# EAGLE board controller (EAGLE 6.1)
DATE: 01/14; PART#: PC-03; PROJECT: CLOCK; REV: A
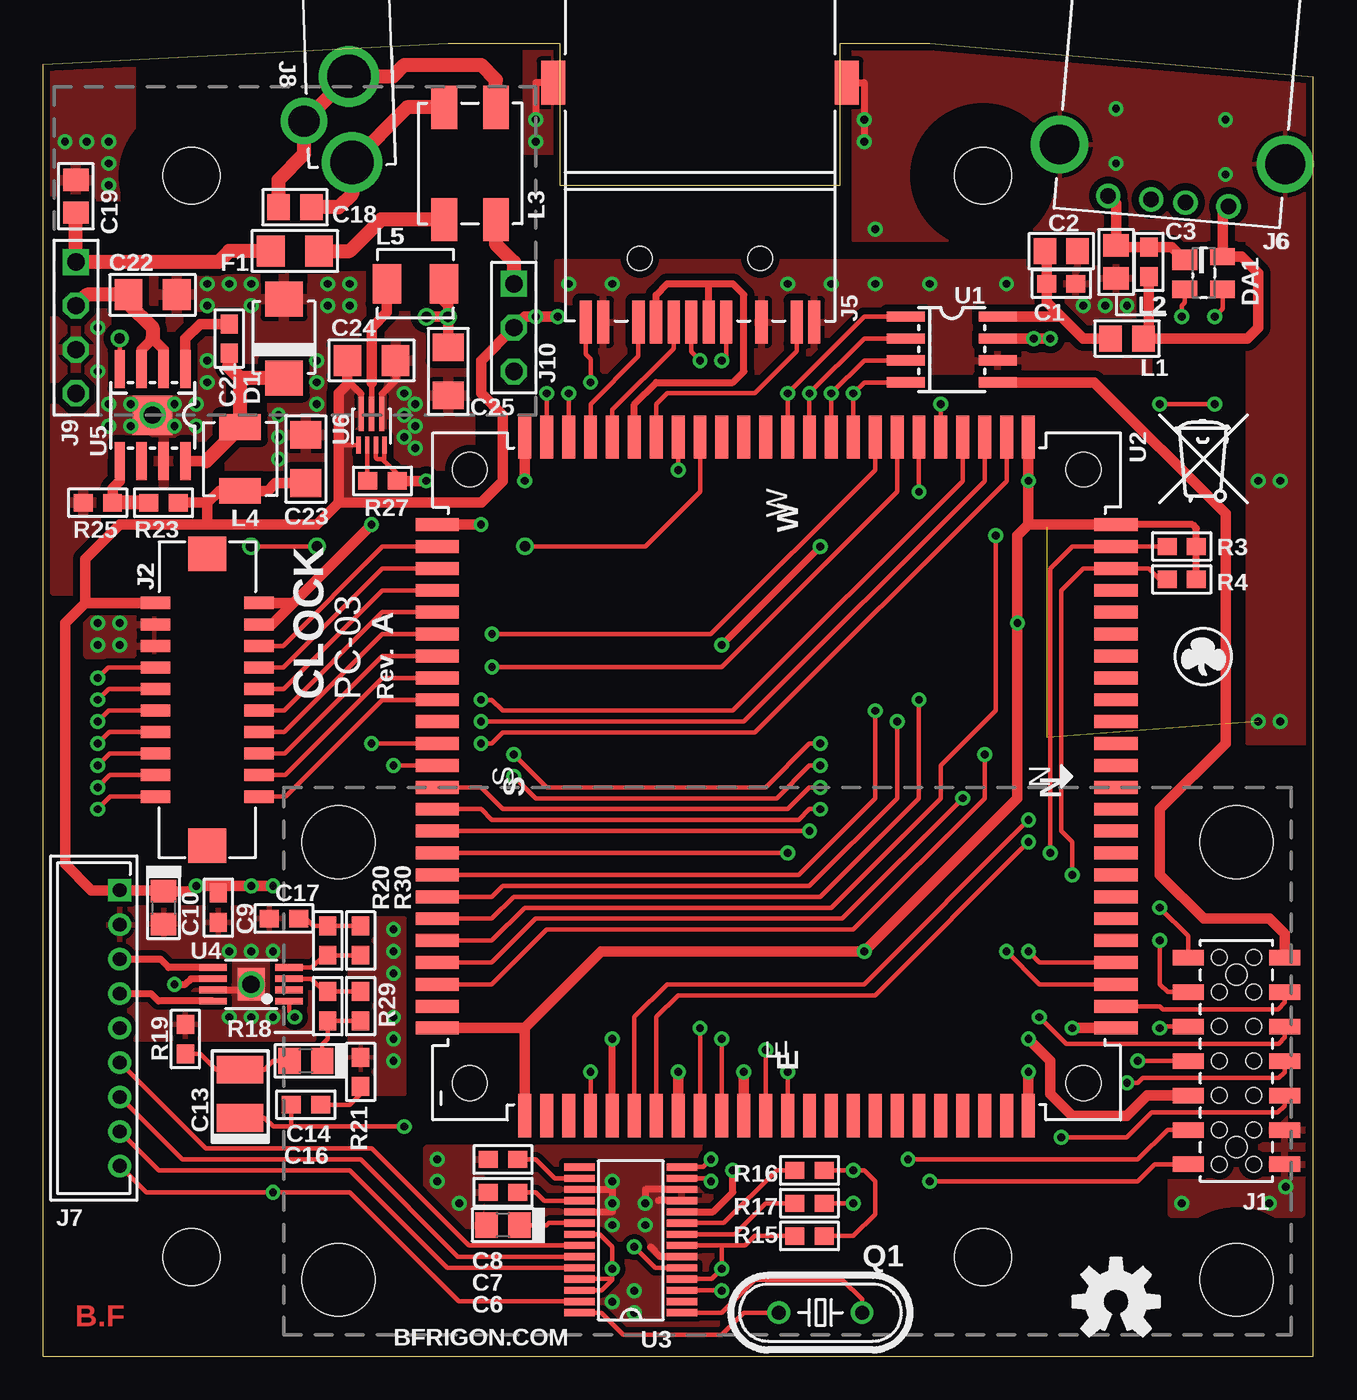
[diagram p0: board, top side]
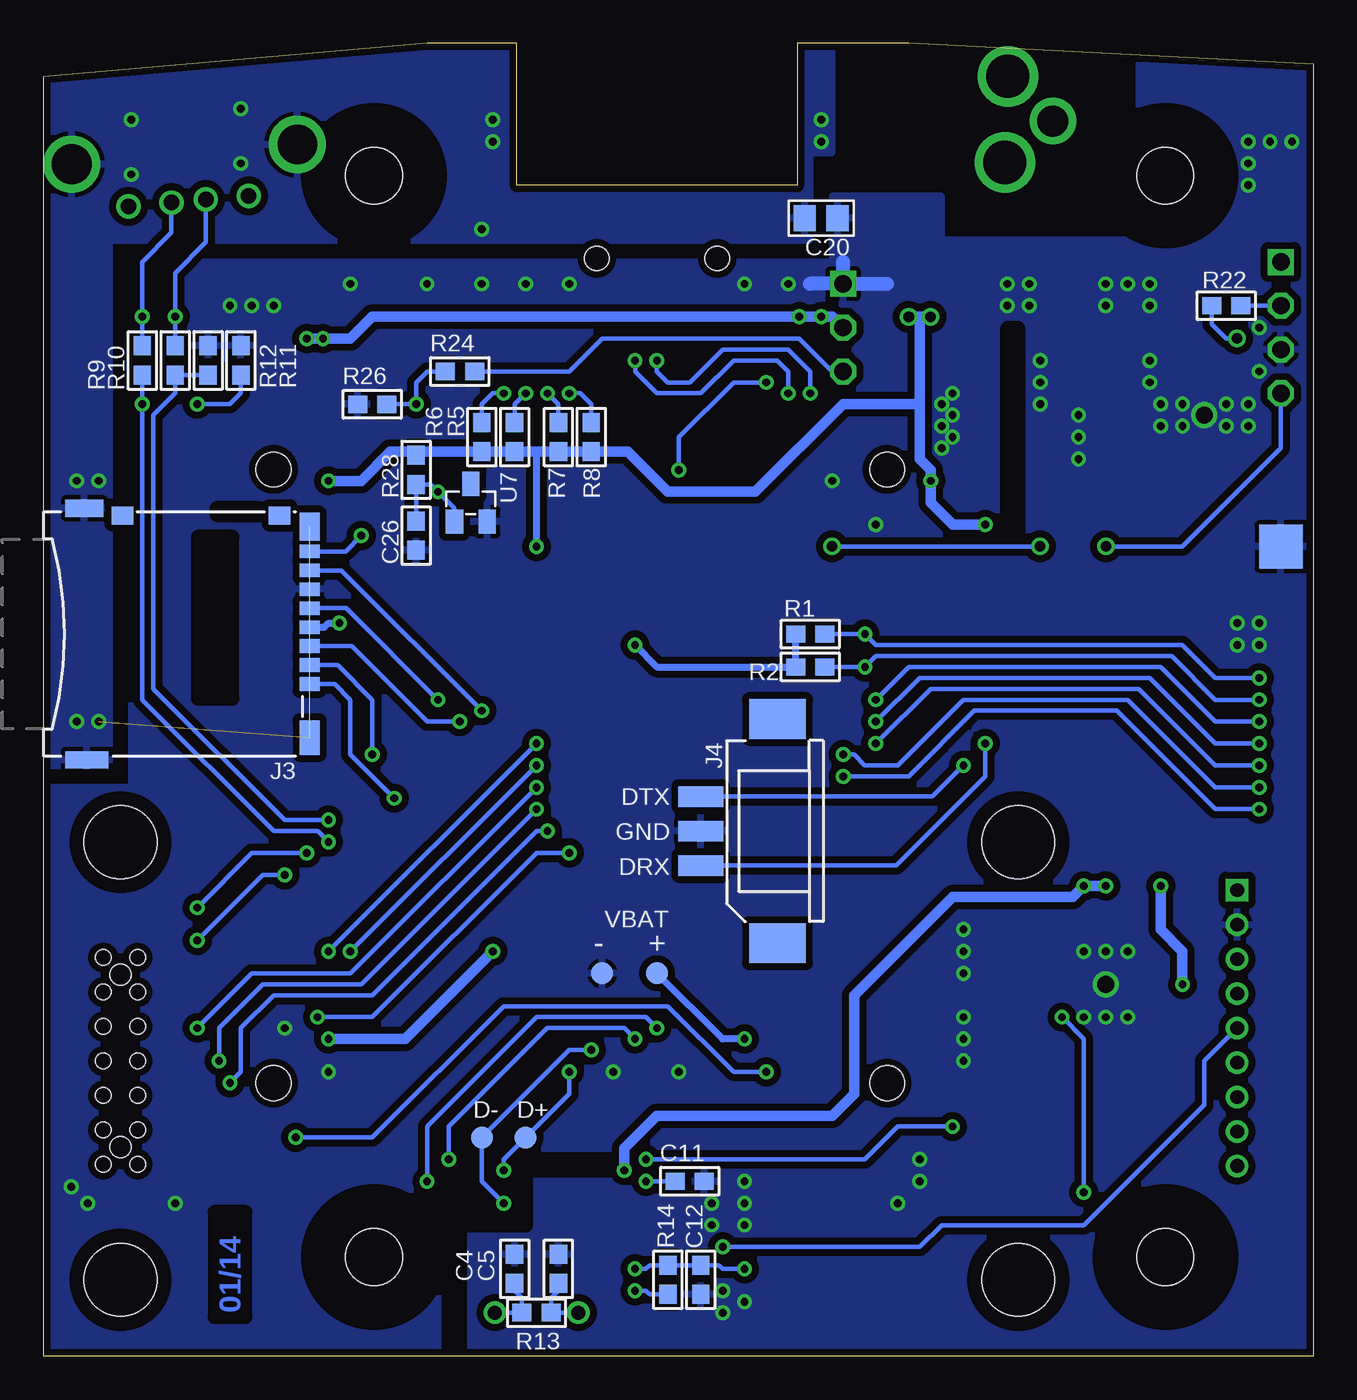
[diagram p1: board, bottom side, seen from below]

Size 73.66 x 76.2 mm. Coordinates in mm from the lower left corner, seen from the top.
Outline: 0,0 73.66,0 73.66,74.24 51.44,76.2 46.23,76.2 46.23,67.94 29.97,67.94 29.97,76.2 23.5,76.2 0,74.98 0,0
Copper layers (1*16): Top 0.035mm / dielectric 1.5mm / Bottom 0.035mm
Design rules: minimum track width 8mil, minimum drill 18mil, track to track 8mil, track to pad 8mil, pad to pad 8mil, via to via 8mil, smd to smd 6mil, copper to edge 15mil, drill to drill 8mil, minimum pad ring 10mil, minimum via ring 8mil, stop-mask expansion 4mil, vias tented up to drill 24mil, thermal gap 10mil
Net classes: 1 Power: width 0.406 mm, drill 0.457 mm, clearance 0.203 mm
Holes 3.28 mm at 8.61,5.77 54.51,5.77 54.51,68.5 8.61,68.5
Holes 4.22 mm at 17.14,4.45 69.22,4.45 69.22,29.84 17.14,29.84
tRestrict: area 4.8,2 to 12.4,9.6; area 4.8,64.7 to 12.4,72.3; area 50.7,2 to 58.3,9.6; area 50.7,64.7 to 58.3,72.3; area 13.3,0.6 to 21,8.3; area 13.3,26 to 21,33.7; area 65.4,26 to 73,33.7; area 65.4,0.6 to 73,8.3
bRestrict: area 4.8,2 to 12.4,9.6; area 4.8,64.7 to 12.4,72.3; area 50.7,64.7 to 58.3,72.3; area 50.7,2 to 58.3,9.6; area 66.7,27.3 to 71.8,32.4; area 66.7,1.9 to 71.8,7; area 14.6,1.9 to 19.7,7; area 14.6,27.3 to 19.7,32.4; area 40.6,0 to 50.2,11.4; area 17.1,47.6 to 17.8,59.7

## Footprints (pad centres in the part's own frame; a part is rotated, then mirrored left to right if it is on the bottom)
SMD_0603 = smd 1.1 x 1: 1 -0.85,0; 2 0.85,0
SMD_0805 = smd 1.3 x 1.5: 1 -0.95,0; 2 0.95,0
CAP_S0805 = smd 1.3 x 1.5: + -0.95,0; - 0.95,0
CAP_S1210 = smd 1.6 x 2.7: + -1.4,0; - 1.4,0
SMD_1206 = smd 1.6 x 1.8: 1 -1.4,0; 2 1.4,0
DIODE_DO214-AA = smd 2.032 x 2.184: A -2.286,0; K 2.286,0
SOT143 = smd 1.2 x 1.44: 1 -0.75,-1.1 | smd 1 x 1.44: 2 0.95,-1.1; 3 0.95,1.1; 4 -0.95,1.1
3M-956214-2XXX = smd 0.9 x 1.8: 1 6,2.8; 2 6,-2.8; 3 4,2.8; 4 4,-2.8; 5 2,2.8; 6 2,-2.8; 7 0,2.8; 8 0,-2.8; 9 -2,2.8; 10 -2,-2.8; 11 -4,2.8; 12 -4,-2.8; 13 -6,2.8; 14 -6,-2.8 | hole 0.9: -4,1; -2,1; -2,-1; -4,-1; -6,1; -6,-1; 0,-1; 0,1; 2,-1; 2,1; 4,-1; 4,1; 6,-1; 6,1 | hole 1.19: -5,0; 5,0
DF13A-20DP-1.25 = smd 0.7 x 1.7: 1 5.625,3; 2 5.625,-3; 3 4.375,3; 4 4.375,-3; 5 3.125,3; 6 3.125,-3; 7 1.875,3; 8 1.875,-3; 9 0.625,3; 10 0.625,-3; 11 -0.625,3; 12 -0.625,-3; 13 -1.875,3; 14 -1.875,-3; 15 -3.125,3; 16 -3.125,-3; 17 -4.375,3; 18 -4.375,-3; 19 -5.625,3; 20 -5.625,-3 | smd 2 x 2.2: A -8.475,0; B 8.475,0
5027020891 = smd 0.8 x 1.16: 1 -2.9,-15.42; 2 -1.8,-15.42; 3 -0.7,-15.42; 4 0.4,-15.42; 5 1.5,-15.42; 6 2.6,-15.42; 7 3.7,-15.42; 8 4.8,-15.42 | smd 1.05 x 1.25: DC 6.885,-13.675; DT 6.885,-4.55 | smd 1 x 2.5: SHDL@3 -7.3,-2.5 | smd 2 x 1.16: SHLD@1 -6.01,-15.42 | smd 1.6 x 1.16: SHLD@2 6.24,-15.42 | smd 1 x 2.2: SHLD@4 7.3,-2.35
DF3DZ-3P-2VXX = smd 1.2 x 2.6: 1 2,0; 2 0,0; 3 -2,0 | smd 2.3 x 3.3: G@1 -6.5,4.45; G@2 6.5,4.45
7498011122R = smd 0.71 x 2.5: P1 -3.57,-21.9; P2 -2.55,-21.9; P3 -1.53,-21.9; P4 -0.51,-21.9; P5 0.51,-21.9; P6 1.53,-21.9; P8 3.57,-21.9; P9 5.61,-21.9; P10 6.63,-21.9; P11 -6.63,-21.9; P12 -5.61,-21.9 | smd 1.4 x 2.54: S1 -8.51,-8.01; S2 8.51,-8.01 | hole 1.4: -3.5,-18.21; 3.5,-18.21
292303-7 = drill 0.9: 1 13,3.5; 2 13,1; 3 13,-1; 4 13,-3.5 | drill 2.3: SHLD@1 10.28,6.57; SHLD@2 10.28,-6.57
DF3X-9P-2DSA = drill 0.8 square: 1 8,0 | drill 0.8: 2 6,0; 3 4,0; 4 2,0; 5 0,0; 6 -2,0; 7 -4,0; 8 -6,0; 9 -8,0
CUI-PJ-013C = drill 2.5: 1 11.2,0; 2 6.2,0 | drill 1.8: 3 8.7,-2.7
HDR_M_4 = drill 1 square: 1 0,0 | drill 1 octagon: 2 2.54,0; 3 5.08,0; 4 7.62,0
HDR_M_3 = drill 1 square: 1 -2.54,0 | drill 1 octagon: 2 0,0; 3 2.54,0
ACM7060 = smd 2.5 x 1.5: IA -3.25,1.5; IB -3.25,-1.5; OA 3.25,1.5; OB 3.25,-1.5
IND_4020 = smd 1.5 x 2.4: 1 -1.85,0; 2 1.85,0
IND_4045 = smd 2.3 x 1.65: 1 0,1.65; 2 0,-1.65
HC49/S = drill 0.813: 1 -2.413,0; 2 2.413,0
TP_050 = smd 1.27 x 1.27: 1 0,0
TP_75X75 = smd 2.54 x 2.54: 1 0,0
SOIC8 = smd 0.6 x 2.2: 1 -1.905,-2.667; 2 -0.635,-2.667; 3 0.635,-2.667; 4 1.905,-2.667; 5 1.905,2.667; 6 0.635,2.667; 7 -0.635,2.667; 8 -1.905,2.667
ARIA_G25 = smd 2.5 x 0.75: E1 19.685,14.605; E2 19.685,13.335; E3 19.685,12.065; E4 19.685,10.795; E5 19.685,9.525; E6 19.685,8.255; E7 19.685,6.985; E8 19.685,5.715; E9 19.685,4.445; E10 19.685,3.175; E11 19.685,1.905; E12 19.685,0.635; E13 19.685,-0.635; E14 19.685,-1.905; E15 19.685,-3.175; E16 19.685,-4.445; E17 19.685,-5.715; E18 19.685,-6.985; E19 19.685,-8.255; E20 19.685,-9.525; E21 19.685,-10.795; E22 19.685,-12.065; E23 19.685,-13.335; E24 19.685,-14.605; W1 -19.685,-14.605; W2 -19.685,-13.335; W3 -19.685,-12.065; W4 -19.685,-10.795; W5 -19.685,-9.525; W6 -19.685,-8.255; W7 -19.685,-6.985; W8 -19.685,-5.715; W9 -19.685,-4.445; W10 -19.685,-3.175; W11 -19.685,-1.905; W12 -19.685,-0.635; W13 -19.685,0.635; W14 -19.685,1.905; W15 -19.685,3.175; W16 -19.685,4.445; W17 -19.685,5.715; W18 -19.685,6.985; W19 -19.685,8.255; W20 -19.685,9.525; W21 -19.685,10.795; W22 -19.685,12.065; W23 -19.685,13.335; W24 -19.685,14.605 | smd 0.75 x 2.5: N1 -14.605,19.685; N2 -13.335,19.685; N3 -12.065,19.685; N4 -10.795,19.685; N5 -9.525,19.685; N6 -8.255,19.685; N7 -6.985,19.685; N8 -5.715,19.685; N9 -4.445,19.685; N10 -3.175,19.685; N11 -1.905,19.685; N12 -0.635,19.685; N13 0.635,19.685; N14 1.905,19.685; N15 3.175,19.685; N16 4.445,19.685; N17 5.715,19.685; N18 6.985,19.685; N19 8.255,19.685; N20 9.525,19.685; N21 10.795,19.685; N22 12.065,19.685; N23 13.335,19.685; N24 14.605,19.685; S1 14.605,-19.685; S2 13.335,-19.685; S3 12.065,-19.685; S4 10.795,-19.685; S5 9.525,-19.685; S6 8.255,-19.685; S7 6.985,-19.685; S8 5.715,-19.685; S9 4.445,-19.685; S10 3.175,-19.685; S11 1.905,-19.685; S12 0.635,-19.685; S13 -0.635,-19.685; S14 -1.905,-19.685; S15 -3.175,-19.685; S16 -4.445,-19.685; S17 -5.715,-19.685; S18 -6.985,-19.685; S19 -8.255,-19.685; S20 -9.525,-19.685; S21 -10.795,-19.685; S22 -12.065,-19.685; S23 -13.335,-19.685; S24 -14.605,-19.685 | hole 2: -17.8,-17.8; 17.8,-17.8; 17.8,17.8; -17.8,17.8
TSSOP28 = smd 0.42 x 1.78: 1 0,-5.94; 2 0.65,-5.94; 3 1.3,-5.94; 4 1.95,-5.94; 5 2.6,-5.94; 6 3.25,-5.94; 7 3.9,-5.94; 8 4.55,-5.94; 9 5.2,-5.94; 10 5.85,-5.94; 11 6.5,-5.94; 12 7.15,-5.94; 13 7.8,-5.94; 14 8.45,-5.94; 15 8.45,0; 16 7.8,0; 17 7.15,0; 18 6.5,0; 19 5.85,0; 20 5.2,0; 21 4.55,0; 22 3.9,0; 23 3.25,0; 24 2.6,0; 25 1.95,0; 26 1.3,0; 27 0.65,0; 28 0,0
PPSOP8 = smd 0.4 x 1.6: 1 -0.975,-2.2; 2 -0.325,-2.2; 3 0.325,-2.2; 4 0.975,-2.2; 5 0.975,2.2; 6 0.325,2.2; 7 -0.325,2.2; 8 -0.975,2.2 | smd 1.89 x 1.57: T 0,0
SOIC8-EP = smd 0.6 x 2.2: 1 -1.905,-2.667; 2 -0.635,-2.667; 3 0.635,-2.667; 4 1.905,-2.667; 5 1.905,2.667; 6 0.635,2.667; 7 -0.635,2.667; 8 -1.905,2.667 | smd 2.3 x 2.3: EP 0,0
QFN-7 = smd 0.25 x 1: 1 -0.75,-1.1; 2 -0.25,-1.1; 3 0.25,-1.1; 4 0.75,-1.1 | smd 0.3 x 2: 5 0.6,0.7; 6 0,0.7; 7 -0.6,0.7
SOT23 = smd 1 x 1.4: 1 -0.95,-1.1; 2 0.95,-1.1; 3 0,1.1

## Placement (x,y rotation side)
C1  100nF  [SMD_0603]  59.05,62.23 0 top
C2  100uF  [SMD_0805]  59.05,64.14 0 top
C3  100nF  [SMD_0603]  64.14,63.5 90 top
C4  [SMD_0603]  46.35,5.08 90 bottom
C5  [SMD_0603]  43.81,5.08 90 bottom
C6  10uF  [CAP_S0805]  26.67,7.62 180 top
C7  1uF  [SMD_0603]  26.67,9.53 180 top
C8  1uF  [SMD_0603]  26.67,11.43 180 top
C9  1uF  [SMD_0603]  10.16,26.04 270 top
C10  10uF  [CAP_S0805]  6.99,26.04 270 top
C11  1uF  [SMD_0603]  36.2,10.16 0 bottom
C12  1uF  [SMD_0603]  35.56,4.45 270 bottom
C13  100uF  [CAP_S1210]  11.43,15.24 90 top
C14  1uF  [CAP_S0805]  15.24,17.14 180 top
C16  22nF  [SMD_0603]  15.24,14.61 0 top
C17  1uF  [SMD_0603]  13.97,25.4 180 top
C18  10uF 50V  [SMD_0805]  14.61,66.67 180 top
C19  10uF 50V  [SMD_0805]  1.91,67.31 90 top
C20  1nF 1kV  [SMD_0805]  28.57,66.04 180 bottom
C21  100nF  [SMD_0603]  10.79,59.05 270 top
C22  10uF 50v  [SMD_1206]  6.35,61.59 0 top
C23  100uF  [SMD_1206]  15.24,52.07 90 top
C24  [SMD_1206]  19.05,57.78 0 top
C25  [SMD_1206]  23.5,57.15 270 top
C26  [SMD_0603]  52.07,47.62 270 bottom
D1  40V 3A  [DIODE_DO214-AA]  13.97,59.05 270 top
DA1  SR05  [SOT143]  67.31,62.87 270 top
F1  3A  [SMD_1206]  14.61,64.14 180 top
J1  DL-2MM-HEADER-14  [3M-956214-2XXX]  69.22,17.14 90 top
J2  DL-1.25MM-HEADER-20  [DF13A-20DP-1.25]  9.53,38.1 90 top
J3  MICRO_SD  [5027020891]  73.66,41.91 90 bottom
J4  SNG-2MM-HEADER-03-SMT-V  [DF3DZ-3P-2VXX]  35.56,30.48 270 bottom
J5  7498011122R  [7498011122R]  38.1,81.92 0 top
J6  USB_A  [292303-7]  66.4,79.98 265 top
J7  SNG-2MM-HEADER-09-V  [DF3X-9P-2DSA]  4.45,19.05 90 top
J8  CUI-PJ-013C  [CUI-PJ-013C]  17.53,80.47 272 top
J9  SNG-100-HEADER-04-HDR-V  [HDR_M_4]  1.91,63.5 270 top
J10  SNG-100-HEADER-03-HDR-V  [HDR_M_3]  27.3,59.69 270 top
L1  1A  [SMD_0805]  62.87,59.05 0 top
L2  1A  [SMD_0805]  62.23,63.5 90 top
L3  ACM7060701-2PL-TL01  [ACM7060]  24.77,69.22 270 top
L4  [IND_4020]  11.43,52.07 270 top
L5  [IND_4045]  21.59,62.23 90 top
Q1  12MHz  [HC49/S]  45.09,2.54 180 top
R1  10k  [SMD_0603]  29.21,41.91 0 bottom
R2  10k  [SMD_0603]  29.21,40.01 0 bottom
R3  10k  [SMD_0603]  66.04,46.99 180 top
R4  10k  [SMD_0603]  66.04,45.09 180 top
R5  100k  [SMD_0603]  46.35,53.34 270 bottom
R6  100k  [SMD_0603]  48.26,53.34 270 bottom
R7  100k  [SMD_0603]  43.81,53.34 270 bottom
R8  100k  [SMD_0603]  41.91,53.34 270 bottom
R9  22  [SMD_0603]  67.94,57.78 90 bottom
R10  22  [SMD_0603]  66.04,57.78 90 bottom
R11  15k  [SMD_0603]  62.23,57.78 270 bottom
R12  15k  [SMD_0603]  64.14,57.78 270 bottom
R13  1M  [SMD_0603]  45.09,2.54 0 bottom
R14  1.5k  [SMD_0603]  37.47,4.45 270 bottom
R15  1.5k  [SMD_0603]  44.45,6.99 180 top
R16  22  [SMD_0603]  44.45,10.79 180 top
R17  22  [SMD_0603]  44.45,8.89 180 top
R18  150k  [SMD_0603]  16.51,20.32 90 top
R19  330  [SMD_0603]  8.26,18.41 270 top
R20  150k  [SMD_0603]  16.51,24.13 270 top
R21  16 1%  [SMD_0603]  18.41,16.51 270 top
R22  100k  [SMD_0603]  5.08,60.96 180 bottom
R23  53.6K 1%  [SMD_0603]  6.99,49.53 0 top
R24  12M 1%  [SMD_0603]  49.53,57.15 0 bottom
R25  10K 1%  [SMD_0603]  3.17,49.53 0 top
R26  4.7M 1%  [SMD_0603]  54.61,55.24 0 bottom
R27  100k  [SMD_0603]  19.68,50.8 0 top
R28  1k  [SMD_0603]  52.07,51.44 90 bottom
R29  N/A  [SMD_0603]  18.41,20.32 90 top
R30  N/A  [SMD_0603]  18.41,24.13 270 top
TP1  +  [TP_050]  38.1,22.23 0 bottom
TP2  -  [TP_050]  41.27,22.23 0 bottom
TP3  [TP_75X75]  1.91,46.99 0 bottom
TP4  [TP_050]  45.72,12.7 0 bottom
TP5  [TP_050]  48.26,12.7 0 bottom
U1  LM3526M-L  [SOIC8]  52.7,58.42 270 top
U2  ARIA_G25  [ARIA_G25]  42.55,33.66 270 top
U3  PCM2704C  [TSSOP28]  31.11,2.54 90 top
U4  TPA2005D1DGN  [PPSOP8]  12.06,21.59 90 top
U5  ADP2303ARDZ  [SOIC8-EP]  6.35,54.61 180 top
U6  TPS62086RLT  [QFN-7]  19.05,53.98 0 top
U7  TS4040D30IDBZ  [SOT23]  48.9,49.53 0 bottom
U$1  [OPENHW_LOGO_200]  62.23,3.17 0 top
U$2  [INFO_DATE]  62.23,2.54 90 bottom
U$3  [INFO_COMPACT]  17.78,43.18 90 top
U$4  [LOGO2]  67.31,40.64 0 top
U$5  [TRASH_SMALL]  67.31,52.07 0 top
U$6  [INFO_AUTHOR]  3.3,2.36 0 top

## Library data of the parts
C1 C3 C5 C7-C9 C11 C12 C16 C17 C21 C26 = Passive; DESCRIPTION: {DESCRIPTION} - SMT 0603 - {value}; PACKAGE: SMT 0603
C2 C18 C20 = Passive; DESCRIPTION: {DESCRIPTION} - SMT 0805 - {value}; PACKAGE: SMT 0805
C4 = Passive; DESCRIPTION: {DESCRIPTION} - SMT 0603 - {value}; DOC: CLK-SCH-03; PACKAGE: SMT 0603; PART#: CLK-PC-03; PROJECT: ALARM CLOCK; REV: A; TITLE: CONTROLLER
C6 C10 C14 L1 = Passive; DESCRIPTION: {DESCRIPTION} - SMT 0805 - {VALUE}
C13 = Passive; DESCRIPTION: {DESCRIPTION} - SMT 1210 - {VALUE}
C19 = Passive; DESCRIPTION: {DESCRIPTION} - SMT 0805 - {value}; DOC: CLK-SCH-03; PACKAGE: SMT 0805; PART_NO: CLK-PC-03; PROJECT: ALARM CLOCK; REV: A; TITLE: CONTROLLER
C22-C25 = Passive; DESCRIPTION: {DESCRIPTION} - SMT 1206 - {value}; PACKAGE: SMT 1206
D1 U7 = Passive
DA1 = Passive; MFG: Semtech; SKU: SR05.TCT
F1 = Passive; DESCRIPTION: {DESCRIPTION} - SMT 1206 - {VALUE}
J1-J3 J5-J10 = Connectors
J4 = Connectors; DESCRIPTION: {DESCRIPTION} - SMT Vertical; MFG: Hirose Electronic; SKU: DF3DZ-3P-2VXX
L2 = Passive; DESCRIPTION: {DESCRIPTION} - SMT 0805 - {VALUE}; DOC: CLK-SCH-03; PART#: CLK-PC-03; PROJECT: ALARM CLOCK; REV: A; TITLE: CONTROLLER
L3 = Passive; DESCRIPTION: {DESCRIPTION} - 4A; SKU: ACM7060-701-2PL-TL01
L4 = Passive; DESCRIPTION: {DESCRIPTION} - 22uH- 3.25A; MFG: Wurth Electronics Inc; SKU: 74437324022
L5 = Passive; DESCRIPTION: {DESCRIPTION} - 470nH - 6.4A; MFG: Cooper Bussmann; SKU: MPI4040R2-R47-R
Q1 = Crystal
R1 R6 R9-R19 R21-R28 = Passive; DESCRIPTION: {DESCRIPTION} - SMT 0603 - {VALUE}; PACKAGE: SMT 0603
R2-R5 R7 R8 R20 = Passive; DESCRIPTION: {DESCRIPTION} - SMT 0603 - {VALUE}; DOC: CLK-SCH-03; PACKAGE: SMT 0603; PART#: CLK-PC-03; PROJECT: ALARM CLOCK; REV: A; TITLE: CONTROLLER
R29 R30 = Passive; DESCRIPTION: {DESCRIPTION} - SMT 0603 - {VALUE}; DOC_ID: CLK-SCH-03; DOC_PART_NO: CLK-PC-03; DOC_REV: A; DOC_TITLE: CONTROLLER; PACKAGE: SMT 0603; PROJECT_NAME: ALARM CLOCK
TP1-TP5 = Misc; NO_BOM: 1
U1 = Power; DESCRIPTION: Dual Port USB Power Switch and Over-Current Protection (Active Low); MFG: National Semiconductors
U2-U4 = IC
U5 = Power
U6 = Power; DESCRIPTION: {DESCRIPTION} - 3.3v; MFG: Texas Instruments
U$1-U$6 = Symbols

## Nets
1WIRE: U2.S2
3.3V [Power]: C25.1 J1.9 J2.2 J2.4 J3.4 L5.2 R1.1 R2.1 R3.1 R4.1 R5.2 R6.2 R7.2 R8.2 R27.2 R28.2 U2.E24 U2.N1 U2.S1 U2.W24 U6.3 U6.4
5V [Power]: C9.1 C10.+ C23.1 C24.1 J2.1 J7.1 J10.2 L4.2 R23.2 U1.7 U3.10 U4.6 U6.1 U6.7
!RESET: J1.10 U2.E21
AD0: R24.1 R26.2 U2.W20
AD1: J2.11 U2.W21
AD2: J2.13 U2.W22
AD3: J2.15 U2.W23
DAC_SHDN: J7.9 U3.27 U4.1
DAC_VDD: C12.1 R14.1 R15.2 U3.4 U3.7 U3.21 U3.25 U3.26
DRX: J4.1 U2.S14
DTX: J4.3 U2.S13
EARTH: C20.2 J3.SHDL@3 J3.SHLD@1 J3.SHLD@2 J3.SHLD@4 J5.S1 J5.S2 J6.SHLD@1 J6.SHLD@2
ETH_3V3: J5.P2 J5.P5 U2.W6
ETH_LINK: J5.P11 U2.W8
ETH_RX+: J5.P4 U2.W2
ETH_RX-: J5.P6 U2.W3
ETH_TRF: J5.P9 U2.W7
ETH_TX+: J5.P1 U2.W4
ETH_TX-: J5.P3 U2.W5
EXP_MISO: J1.6 U2.S9
EXP_MOSI: J1.8 U2.S10
EXP_NPCS0: J1.5 U2.S12
EXP_SPCK: J1.7 U2.S11
GND: C1.2 C2.2 C4.2 C5.2 C6.- C7.2 C8.2 C9.2 C10.- C11.2 C12.2 C17.2 C19.2 C20.1 C22.2 C23.2 C24.2 C25.2 C26.2 D1.A J1.12 J1.14 J2.3 J2.5 J3.6 J4.2 J5.P8 J5.P10 J5.P12 J7.2 J9.3 J10.1 L2.1 L3.OA R11.1 R12.1 R19.1 R21.1 R25.1 R26.1 TP2.1 TP3.1 U1.6 U2.E1 U2.E14 U2.E17 U2.N24 U2.S24 U2.W1 U3.6 U3.11 U3.12 U3.17 U3.19 U4.7 U4.T U5.7 U5.EP U6.5 U7.2
N$1: TP1.1 U2.E20
N$2: C18.2 J8.2 J8.3 L3.IA
N$3: R22.2 U5.4
N$4: C18.1 J8.1 L3.IB
N$5: C3.1 DA1.4 J6.1 L1.2
N$6: C3.2 DA1.1 J6.4 L2.2
N$7: DA1.3 J6.2 R9.2
N$8: DA1.2 J6.3 R10.2
N$11: C21.1 U5.1
N$12: R16.2 U3.9
N$13: R17.2 U3.8
N$14: C11.1 U3.13
N$15: C7.1 U3.18
N$16: C6.+ U3.20
N$17: C8.1 U3.16
N$18: C14.+ R18.1 R29.1
N$19: R14.2 U3.3
N$20: J7.6 U3.22
N$21: J7.7 U3.23
N$22: J7.8 U3.24
N$23: C13.+ C16.1 U3.14
N$24: J7.3 U4.5
N$25: J7.4 U4.8
N$26: R18.2 R29.2 U4.3
N$27: R20.2 R30.2 U4.4
N$28: C17.1 R20.1 R30.1
N$29: C13.- C14.- R19.2
N$30: J7.5 U3.5
N$31: C16.2 R21.2
N$32: F1.1 L3.OB
N$33: C21.2 D1.K L4.1 U5.8
N$34: R23.1 R25.2 U5.5
N$35: L5.1 U6.6
N$36: R27.1 U6.2
PA0: J2.6 U2.S23
PA1: J2.8 U2.S22
PA2: J2.10 U2.S21
PA3: J2.12 U2.S20
PA4: J2.14 U2.S19
PA5: J2.16 U2.S18
PA6: J2.18 U2.S17
PA7: J2.20 U2.S16
PA8: U2.S15
PA23: U2.W10
PA24: U2.W11
PA25: U2.W12
PC17: U2.N19
PWM0: U2.N20
PWM1: J2.17 U2.N21
PWM2: J2.19 U2.N22
PWM3: J1.4 U2.N23
SCL0: J2.9 R2.2 U2.W18
SCL1: J1.3 R4.2 U2.N3
SD_CLK: J3.5 U2.S6
SD_CMD: J3.3 U2.S7
SD_DAT0: J3.7 U2.S8
SD_DAT1: J3.8 U2.S5
SD_DAT2: J3.1 U2.S4
SD_DAT3: J3.2 U2.S3
SDA0: J2.7 R1.2 U2.W17
SDA1: J1.1 R3.2 U2.N2
USB_EN1: R8.1 U1.1 U2.W13
USB_EN2: R6.1 U1.4 U2.W16
USB_FLAG1: R7.1 U1.2 U2.W14
USB_FLAG2: R5.1 U1.3 U2.W15
USBA_5V: C1.1 C2.1 L1.1 U1.8
USBA_D+: R10.1 R12.2 U2.E19
USBA_D-: R9.1 R11.2 U2.E18
USBB_5V: J1.2 U1.5
USBB_D+: J1.13 U2.E16
USBB_D-: J1.11 U2.E15
USBC_D+: R15.1 R16.1 TP4.1 U2.E12
USBC_D-: R17.1 TP5.1 U2.E13
V_AUX_MON: J10.3 R24.2
V_AUX_ON: J9.4 U2.W9
V_MAIN: C19.1 F1.2 J9.1
VCC: C22.1 J9.2 R22.1 U5.2 U5.3
VREF: C26.1 R28.1 U2.W19 U7.1
XTI: C5.1 Q1.2 R13.2 U3.28
XTO: C4.1 Q1.1 R13.1 U3.1

## Tracks (layer width: path | path; a pad name or v marks a point on that pad's centre or on a via)
3.3V  (via drill 0.46, 0.61)
  Top 0.254: U6.4 19.8,51.95 | 19.8,51.95 20.54,51.22 R27.2 | U6.3 19.3,52.14 19.37,52.07 19.68,52.07 19.8,51.95
  Top 0.406: v39.37,41.27 v45.09,46.99 | R4.1 R3.1 66.89,48.05 66.67,48.26 U2.N1
  Top 0.61: U2.N1 57.15,48.26 | 57.15,48.26 v57.15,50.8 U2.W24 | 57.15,48.26 56.52,47.62 v56.52,42.55 56.52,32.38 v47.62,23.5 32.38,23.5 27.94,19.05 | 27.94,19.05 U2.E24 | U2.S1 27.94,19.05 | J1.9 64.04,15.14 62.87,13.97 59.69,13.97 58.42,15.24 58.42,17.14 v57.15,18.41 | 14.52,43.73 13.27,42.48 J2.4 | 14.52,43.73 v19.05,48.26 | J2.2 14.52,43.73 | C25.1 v23.5,60.33 | v23.5,60.33 v22.23,60.33 | v22.23,50.8 R27.2 | L5.2 23.24,61.22 23.5,60.96 v23.5,60.33
  Bottom 0.406: J3.4 57.38,42.31 57.15,42.55 v56.52,42.55 | v45.09,46.99 45.09,52.49 | 30.06,41.27 R1.1 R2.1 38.1,40.01 v39.37,41.27
  Bottom 0.61: v57.15,50.8 55.24,50.8 53.55,52.49 52.07,52.49 | 52.07,52.49 R6.2 R5.2 45.09,52.49 R7.2 R8.2 39.79,52.49 37.47,50.16 32.38,50.16 27.3,55.24 22.86,55.24 | R28.2 52.07,52.49 | v47.62,23.5 52.7,18.41 v57.15,18.41 | v22.23,60.33 22.86,60.33 | 22.86,60.33 v23.5,60.33 | v19.05,48.26 20.95,48.26 22.23,49.53 v22.23,50.8 22.23,51.44 22.86,52.07 22.86,55.24 | 22.86,55.24 22.86,60.33
5V  (via drill 0.46)
  Top 0.254: U6.1 17.14,52.88 17.14,53.34
  Top 0.305: U6.7 18.45,55.84
  Top 0.406: U3.10 38.87,8.39 40.01,9.53 v40.01,10.79 | 18.45,55.84 17.65,56.65 | v7.62,21.59 8.26,21.59 8.58,21.91 U4.6
  Top 0.61: v58.42,59.05 v57.47,59.05 U1.7 | C24.1 17.65,56.65 17.65,56.38 17.14,55.88 17.14,53.34 17.14,49.53 | 2.45,43.73 1.27,42.55 1.27,28.57 2.79,27.05 J7.1 6.99,27.05 C10.+ 8.57,26.98 v8.89,27.3 | J2.1 2.45,43.73 | 9.53,48.26 4.45,48.26 2.45,46.27 2.45,43.73 | 9.53,48.26 15.88,48.26 17.14,49.53 | 9.53,49.53 9.53,48.26 | 15.74,50.67 C23.1 13.46,50.67 13.02,50.22 L4.2 10.21,50.22 9.53,49.53 | 17.14,49.53 25.4,49.53 26.67,50.8 26.67,54.61 25.4,55.88 25.4,57.78 J10.2 27.94,60.33 v28.57,60.33 v29.84,60.33 | R23.2 9.53,49.53 | v13.34,27.3 v12.06,27.3 v8.89,27.3 | C9.1 10.16,27.3 v8.89,27.3
  Bottom 0.61: v58.42,59.05 v57.47,59.05 55.88,59.05 54.61,60.33 v28.57,60.33 27.94,60.33 J10.2 | v40.01,10.79 40.01,12.06 38.1,13.97 27.94,13.97 26.67,15.24 26.67,20.95 20.95,26.67 13.97,26.67 v13.34,27.3 v12.06,27.3 | v7.62,21.59 7.62,23.5 8.89,24.77 v8.89,27.3
  pour Top: 17.14,55.88 17.14,49.85 17.78,49.85 17.78,53.98 18.41,53.98 18.41,55.88 17.78,56.52
!RESET  (via drill 0.46)
  Top 0.254: J1.10 72.02,14.55 71.61,14.15 64.31,14.15 62.87,12.7 v59.05,12.7 | U2.E21 v31.75,16.51
  Bottom 0.254: v31.75,16.51 33.66,16.51 37.47,20.32 46.99,20.32 54.61,12.7 v59.05,12.7
AD0  (via drill 0.46)
  Top 0.254: U2.W20 v52.07,55.24
  Bottom 0.254: R26.2 v52.07,55.24 52.07,56.52 51.44,57.15 R24.1
AD1  (via drill 0.46)
  Top 0.254: U2.W21 53.34,50.8 40.01,37.47 26.67,37.47 26.04,38.1 v25.4,38.1 | J2.11 3.82,37.48 v3.17,36.83
  Bottom 0.254: v25.4,38.1 23.5,40.01 8.89,40.01 5.71,36.83 v3.17,36.83
AD2  (via drill 0.46)
  Top 0.254: U2.W22 54.61,50.8 40.64,36.83 v25.4,36.83 | J2.13 3.84,36.23 v3.17,35.56
  Bottom 0.254: v25.4,36.83 22.86,39.37 9.53,39.37 5.71,35.56 v3.17,35.56
AD3  (via drill 0.46)
  Top 0.254: U2.W23 55.88,50.8 41.27,36.2 26.67,36.2 26.04,35.56 v25.4,35.56 | J2.15 3.86,34.98 v3.17,34.29
  Bottom 0.254: v25.4,35.56 22.23,38.73 10.16,38.73 5.71,34.29 v3.17,34.29
DAC_SHDN  (via drill 0.46)
  Top 0.254: U3.27 24.11,3.19 17.78,9.53 v13.34,9.53 5.97,9.53 J7.9 | U4.1 14.27,20.02 v14.61,19.68
  Bottom 0.254: v14.61,19.68 13.34,18.41 v13.34,9.53
DAC_VDD  (via drill 0.46)
  Top 0.254: R15.2 41.27,6.99 40.73,6.44 39.37,6.44 | U3.21 32.28,7.09 33.02,6.35 v33.02,5.08 33.02,4.49 | U3.25 33.02,4.49 | U3.26 32.41,3.84 33.02,4.45 33.02,4.49 | U3.7 39.37,6.44 | 39.37,6.44 v39.37,5.08 38.78,4.49 U3.4
  Bottom 0.254: v33.02,5.08 34.29,5.08 34.51,5.29 C12.1 R14.1 38.52,5.29 38.73,5.08 v39.37,5.08
DRX  (via drill 0.46)
  Top 0.254: U2.S14 v19.05,35.56
  Bottom 0.254: v19.05,35.56 19.05,33.66 24.23,28.48 J4.1
DTX  (via drill 0.46)
  Top 0.254: U2.S13 v20.32,34.29
  Bottom 0.254: J4.3 22.13,32.48 v20.32,34.29
EARTH  (via drill 0.46)  (2 unrouted)
  Top 0.406: J5.S1 28.57,73.91 v28.57,71.75 | J5.S2 47.62,73.91 v47.62,70.48
  other vias: 70.48,36.83 71.75,36.83 71.75,50.8 70.48,50.8 68.58,68.58 68.58,71.75 62.23,72.39 62.23,69.22 47.62,71.75 28.57,70.48 48.26,65.41
  pour Top (isolate 0.406): 46.99,64.77 46.99,76.2 51.44,76.2 73.66,74.3 73.66,35.56 69.85,35.56 69.85,64.77
  pour Bottom (isolate 0.406): 29.21,64.77 29.21,69.85 27.94,69.85 27.94,76.2 29.84,76.2 29.84,67.94 46.35,67.94 46.35,76.2 51.44,76.2 73.66,74.3 73.66,34.29 69.85,34.29 69.85,64.77
  pour Top: 27.94,69.85 27.94,76.2 29.84,76.2 29.84,69.85
ETH_3V3
  Top 0.254: 38.61,62.1 38.73,62.23
  Top 0.406: J5.P2 35.55,61.59 36.2,62.23 38.73,62.23 40.01,62.23 40.64,61.59 40.64,57.15 40.01,56.52 35.56,56.52 34.29,55.24 U2.W6 | J5.P5 38.61,62.1
ETH_LINK  (via drill 0.46)
  Top 0.254: U2.W8 v36.83,51.44 | J5.P11 31.47,58.14 31.75,57.86 v31.75,56.52
  Bottom 0.254: v36.83,51.44 U2.W8 33.66,56.52 v31.75,56.52
ETH_RX+  (via drill 0.46)
  Top 0.254: U2.W2 v29.21,55.88 | J5.P4 37.59,58.3 v38.1,57.78
  Bottom 0.254: v29.21,55.88 29.21,57.15 30.48,58.42 34.29,58.42 36.2,56.52 37.47,56.52 38.1,57.15 v38.1,57.78
ETH_RX-  (via drill 0.46)
  Top 0.254: U2.W3 v30.48,55.88 | J5.P6 39.63,58.05 v39.37,57.78
  Bottom 0.254: v30.48,55.88 30.48,57.15 31.11,57.78 33.66,57.78 35.56,55.88 38.1,55.88 39.37,57.15 v39.37,57.78
ETH_TRF
  Top 0.254: U2.W7 35.56,55.24 36.2,55.88 41.27,55.88 43.71,58.31 J5.P9
ETH_TX+
  Top 0.254: J5.P1 34.53,58.02 31.75,55.24 U2.W4
ETH_TX-
  Top 0.254: J5.P3 36.57,58.48 33.02,54.93 U2.W5
EXP_MISO  (via drill 0.46)
  Top 0.254: v57.78,19.68 59.33,18.14 71.65,18.14 72.02,18.5 J1.6 | v43.18,29.21 U2.S9
  Bottom 0.254: v57.78,19.68 54.61,19.68 45.09,29.21 v43.18,29.21
EXP_MOSI  (via drill 0.46)
  Top 0.254: v62.87,15.88 63.5,15.88 63.78,16.15 71.68,16.15 72.02,16.49 J1.8 | v44.45,30.48 U2.S10
  Bottom 0.254: v62.87,15.88 62.23,16.51 62.23,19.05 60.33,20.95 54.61,20.95 45.09,30.48 v44.45,30.48
EXP_NPCS0  (via drill 0.46)
  Top 0.254: J1.5 64.86,19.14 v64.77,19.05 | v45.09,33.02 44.45,33.02 43.18,31.75 26.67,31.75 25.4,33.02 U2.S12
  Bottom 0.254: v64.77,19.05 61.59,22.23 55.88,22.23 v45.09,33.02
EXP_SPCK  (via drill 0.46)
  Top 0.254: J1.7 v63.5,17.14 | v45.09,31.75 44.45,31.75 43.81,31.11 26.04,31.11 25.4,31.75 U2.S11
  Bottom 0.254: v63.5,17.14 63.5,19.05 60.96,21.59 55.24,21.59 v45.09,31.75
GND  (via drill 0.46, 1)
  Top 0.305: U6.5 19.65,55.84
  Top 0.406: 19.65,55.84 20.45,56.65 C24.2 | U4.7 12.06,21.27 U4.T | U3.17 33.02,9.69 v33.02,8.89 33.02,8.39 U3.19 | U3.12 34.92,9.69 v34.92,8.89 | U3.6 35.8,5.79 35.24,6.35 | U3.11 35.69,9.04
  Top 0.61: U2.W1 v27.94,50.8 | v25.4,48.26 U2.S24 | v59.69,19.05 U2.N24 | v57.15,16.51 U2.E1 | v40.64,16.51 U2.E14 | v36.83,16.51 U2.E17
  Top 0.813: L3.OA 26.27,64.54 27.3,63.5 J10.1
  Bottom 0.813: J10.1 29.21,62.23 | J10.1 24.77,62.23 | J10.1 27.3,63.5
  other vias: 48.26,62.23 62.87,60.96 55.88,62.23 61.59,60.96 30.48,62.23 51.44,62.23 60.33,60.96 72.07,9.84 71.12,8.89 66.04,8.89 33.02,10.16 34.29,2.54 33.02,3.17 33.02,7.62 24.13,8.89 22.86,11.43 22.86,10.16 20.32,22.23 20.32,19.68 12.06,23.5 13.34,23.5 20.32,17.14 12.06,21.59 12.06,19.68 10.79,19.68 13.34,19.68 4.45,42.55 4.45,41.27 10.79,23.5 3.17,42.55 3.17,41.27 8.89,55.24 9.53,56.52 9.53,62.23 10.79,62.23 7.62,55.24 3.81,53.98 8.89,53.98 20.95,54.61 9.53,57.78 3.81,55.24 5.08,55.24 1.27,70.48 2.54,70.48 3.81,70.48 3.81,69.22 7.62,53.98 3.17,57.15 6.35,54.61 5.08,53.98 20.95,53.34 3.17,59.69 45.72,62.23 33.02,62.23 43.18,62.23 21.59,52.7 20.95,55.88 12.06,62.23 16.51,62.23 17.78,62.23 16.51,60.96 17.78,60.96 15.88,55.24 13.65,52.07 15.88,56.52 15.88,57.78 13.65,53.34 13.65,54.61 21.59,55.24 21.59,53.98 12.06,60.96 9.53,60.96 20.32,24.77 20.32,23.5 20.32,18.41 34.92,7.62 34.29,3.81 3.81,67.94
  pour Bottom (isolate 0.406): 73.66,0 0,0 0,76.2 10.16,76.2 10.16,64.77 21.59,64.77 21.59,67.31 27.94,67.31 27.94,63.5 68.58,63.5 68.58,33.02 73.66,33.02
  pour Top (isolate 0.406): 29.84,57.15 29.84,63.5 64.14,63.5 64.14,57.15
  pour Top (isolate 0.406): 73.03,8.26 73.03,13.97 65.41,13.97 65.41,8.26
  pour Top (isolate 0.305): 41.91,1.27 41.91,12.06 28.57,12.06 28.57,1.27
  pour Top (isolate 0.406): 25.4,6.99 25.4,12.06 22.23,12.06 22.23,6.99
  pour Top (isolate 0.254): 17.78,25.4 17.78,15.24 20.95,15.24 20.95,25.4
  pour Top (isolate 0.406): 2.54,40.64 2.54,43.18 6.35,43.18 6.35,40.64
  pour Top (isolate 0.406): 0.64,44.45 0.64,62.23 24.77,62.87 24.77,49.53 5.71,49.53 2.54,46.35 2.54,44.45
  pour Top (isolate 0.406): 5.08,67.31 0,67.31 0,74.93 5.08,74.93
  pour Top (isolate 0.305): 3.81,26.04 15.88,26.04 15.88,18.41 3.81,18.41
N$1  (via drill 0.46)
  Top 0.406: U2.E20 v33.02,18.41
  Bottom 0.406: v33.02,18.41 34.29,18.41 TP1.1
N$2
  Top 0.813: L3.IA 26.27,74.06 25.4,74.93 20.95,74.93 20.3,74.27 J8.2 15.15,71.68 J8.3 15.13,69.74 13.65,68.27 C18.2
N$3  (via drill 0.61)
  Top 0.254: U5.4 v4.45,59.05
  Bottom 0.254: R22.2 5.93,59.91 5.08,59.05 v4.45,59.05
N$4
  Top 0.813: L3.IB 21.11,72.47 J8.1 17.92,67.45 17.14,66.67 C18.1
N$5
  Top 0.61: C3.1 64.14,59.05 | 64.14,59.05 L1.2 | J6.1 68.41,66.39 DA1.4 69.53,63.81 70.48,62.87 70.48,59.69 69.85,59.05 64.14,59.05
N$6
  Top 0.61: J6.4 62.23,66.89 L2.2 62.55,64.45 62.65,64.35 C3.2 65.47,64.35 DA1.1
N$7  (via drill 0.46)
  Top 0.254: DA1.3 68.41,60.79 v67.94,60.33
  Bottom 0.254: R9.2 v67.94,60.33 67.94,63.5 66.26,65.19 J6.2
N$8  (via drill 0.46)
  Top 0.254: v66.04,60.33 66.04,60.96 66.21,61.13 DA1.2
  Bottom 0.254: R10.2 v66.04,60.33 66.04,62.87 64.27,64.64 J6.3
N$11
  Top 0.61: C21.1 9.11,59.91 8.26,59.05 U5.1
N$12
  Top 0.254: U3.9 39.49,7.74 42.55,10.79 R16.2
N$13
  Top 0.254: U3.8 40.11,7.09 41.91,8.89 R17.2
N$14  (via drill 0.46)
  Top 0.254: U3.13 38.55,10.34 v38.73,10.16
  Bottom 0.254: v38.73,10.16 C11.1
N$15
  Top 0.254: U3.18 29.06,9.04 28.57,9.53 C7.1
N$16
  Top 0.254: U3.20 29.33,7.74 29.21,7.62 C6.+
N$17
  Top 0.254: U3.16 29.66,10.34 28.57,11.43 C8.1
N$18
  Top 0.254: C14.+ 16.19,18.09 16.51,18.41 R18.1 R29.1
N$19  (via drill 0.46)
  Top 0.254: U3.3 39.34,3.84 v39.37,3.81
  Bottom 0.254: R14.2 38.52,3.6 38.73,3.81 v39.37,3.81
N$20
  Top 0.254: U3.22 24.68,6.44 19.05,12.06 9.43,12.06 J7.6
N$21
  Top 0.254: U3.23 24.05,5.79 18.41,11.43 8.06,11.43 J7.7
N$22
  Top 0.254: U3.24 23.43,5.14 17.78,10.79 6.7,10.79 J7.8
N$23  (via drill 0.46)
  Top 0.254: U3.14 38.3,10.99 v38.73,11.43 | 14.39,13.34 13.34,13.34 12.83,13.84 C13.+ | 14.39,13.34 v20.95,13.34 | C16.1 14.39,13.34
  Bottom 0.254: v38.73,11.43 26.04,11.43 24.13,13.34 v20.95,13.34
N$24
  Top 0.406: J7.3 6.79,23.05 7.28,22.57 U4.5
N$25
  Top 0.406: U4.8 6.69,20.61 6.25,21.05 J7.4
N$26
  Top 0.254: R29.2 R18.2 16.3,21.17 15.55,21.91 U4.3
N$27
  Top 0.254: U4.4 15.58,22.57 16.3,23.28 R20.2 R30.2
N$28
  Top 0.254: R30.1 R20.1 15.66,24.98 15.24,25.4 C17.1
N$29
  Top 0.254: R19.2 9.11,17.57 10.03,16.64 C13.- 12.83,16.64 13.34,17.14 C14.-
N$30  (via drill 0.46)
  Top 0.254: U3.5 35.5,5.14 v34.29,6.35
  Bottom 0.254: v34.29,6.35 22.86,6.35 21.59,7.62 13.34,7.62 6.35,14.61 6.35,17.14 J7.5
N$31
  Top 0.254: C16.2 17.78,14.61 18.41,15.24 R21.2
N$32
  Top 0.813: L3.OB 19.61,65.97 17.78,64.14 F1.1
N$33
  Top 0.61: 9.45,51.94 U5.8
  Top 0.813: 11.43,56.77 L4.1 9.45,51.94 | D1.K 11.43,56.77 | C21.2 10.79,57.4 11.43,56.77
N$34
  Top 0.61: R25.2 4.03,50.38 4.45,50.8 U5.5
  Top 0.813: R23.1 R25.2
N$35
  Top 0.305: U6.6 19.05,56.52
  Top 0.61: L5.1 19.94,60.58 19.05,59.69 19.05,56.52
N$36
  Top 0.254: U6.2 18.8,50.8 R27.1
PA0
  Top 0.203: 21.59,46.99 U2.S23
  Top 0.254: 21.59,46.99 19.68,46.99 13.92,41.23 J2.6
PA1
  Top 0.203: 21.59,45.72 U2.S22
  Top 0.254: 21.59,45.72 19.68,45.72 13.94,39.98 J2.8
PA2
  Top 0.203: 21.59,44.45 U2.S21
  Top 0.254: 21.59,44.45 19.68,44.45 13.96,38.73 J2.10
PA3
  Top 0.203: 21.59,43.18 U2.S20
  Top 0.254: 21.59,43.18 19.68,43.18 13.98,37.48 J2.12
PA4
  Top 0.203: 21.59,41.91 U2.S19
  Top 0.254: 21.59,41.91 19.68,41.91 14,36.23 J2.14
PA5
  Top 0.203: 21.59,40.64 U2.S18
  Top 0.254: 21.59,40.64 19.68,40.64 14.02,34.98 J2.16
PA6
  Top 0.203: 21.59,39.37 U2.S17
  Top 0.254: 21.59,39.37 19.68,39.37 14.04,33.73 J2.18
PA7
  Top 0.203: 21.59,38.1 U2.S16
  Top 0.254: 21.59,38.1 19.68,38.1 14.06,32.48 J2.20
PWM1  (via drill 0.46)
  Top 0.254: v27.3,34.92 29.21,33.02 41.91,33.02 44.45,35.56 v45.09,35.56 | v57.15,23.5 57.78,22.86 U2.N21 | J2.17 3.88,33.73 v3.17,33.02
  Bottom 0.254: v3.17,33.02 5.71,33.02 10.79,38.1 20.32,38.1 24.13,34.29 26.04,34.29 26.67,34.92 v27.3,34.92 | v45.09,35.56 v57.15,23.5
PWM2  (via drill 0.46)
  Top 0.254: U2.N22 57.78,21.59 v55.88,23.5 | v45.09,34.29 44.45,34.29 42.55,32.38 28.57,32.38 v27.3,33.66 | J2.19 3.9,32.48 v3.17,31.75
  Bottom 0.254: v55.88,23.5 v45.09,34.29 | v27.3,33.66 23.5,33.66 19.68,37.47 11.43,37.47 5.71,31.75 v3.17,31.75
PWM3
  Top 0.254: J1.4 72.02,20.53 71.63,20.14 64.95,20.14 64.77,20.32 U2.N23
SCL0  (via drill 0.46)
  Top 0.254: U2.W18 49.53,50.16 39.37,40.01 v26.04,40.01 | J2.9 3.8,38.73 v3.17,38.1
  Bottom 0.254: v3.17,38.1 5.71,38.1 8.26,40.64 25.4,40.64 v26.04,40.01 R2.2
SCL1  (via drill 0.46)
  Top 0.254: J1.3 65.22,21.14 64.77,21.59 v64.77,24.13 | v59.69,27.94 59.69,29.84 59.05,30.48 59.05,44.45 60.33,45.72 U2.N3 64.14,45.72 64.77,45.09 R4.2
  Bottom 0.254: v64.77,24.13 60.96,27.94 v59.69,27.94
SD_CLK  (via drill 0.46)
  Top 0.254: v50.8,38.1 50.8,32.38 45.09,26.67 27.3,26.67 26.04,25.4 U2.S6
  Bottom 0.254: J3.5 56.11,43.41 v50.8,38.1
SD_CMD  (via drill 0.46)
  Top 0.254: v49.53,36.83 49.53,32.38 44.45,27.3 26.67,27.3 26.04,26.67 U2.S7
  Bottom 0.254: J3.3 55.81,41.21 51.44,36.83 v49.53,36.83
SD_DAT0  (via drill 0.46)
  Top 0.254: v48.26,37.47 48.26,32.38 43.81,27.94 U2.S8
  Bottom 0.254: J3.7 56.41,45.61 v48.26,37.47
SD_DAT1  (via drill 0.46)
  Top 0.254: v55.24,47.62 55.24,37.47 52.07,34.29 52.07,32.38 45.72,26.04 27.94,26.04 26.04,24.13 U2.S5
  Bottom 0.254: v55.24,47.62 56.16,46.71 J3.8
SD_DAT2  (via drill 0.46)
  Top 0.254: v53.34,32.38 46.35,25.4 28.57,25.4 26.04,22.86 U2.S4
  Bottom 0.254: J3.1 56.79,39.01 55.88,38.1 55.88,34.92 v53.34,32.38
SD_DAT3  (via drill 0.46)
  Top 0.254: v54.61,34.92 54.61,32.38 46.99,24.77 29.21,24.77 26.04,21.59 U2.S3
  Bottom 0.254: J3.2 56.62,40.11 54.61,38.1 v54.61,34.92
SDA0  (via drill 0.46)
  Top 0.254: U2.W17 48.26,51.44 38.73,41.91 v26.04,41.91 | J2.7 3.78,39.98 v3.17,39.37
  Bottom 0.254: v3.17,39.37 5.71,39.37 7.62,41.27 25.4,41.27 v26.04,41.91 R1.2
SDA1  (via drill 0.46)
  Top 0.254: v58.42,29.21 58.42,45.72 59.69,46.99 U2.N2 R3.2 | J1.1 66.42,24.39 v64.77,26.04
  Bottom 0.254: v64.77,26.04 61.59,29.21 v58.42,29.21
USB_EN1  (via drill 0.46)
  Top 0.254: U1.1 47.62,60.33 v43.18,55.88 U2.W13
  Bottom 0.254: v43.18,55.88 42.55,55.88 41.91,55.24 R8.1
USB_EN2  (via drill 0.46)
  Top 0.254: U1.4 47.62,56.52 v46.99,55.88 U2.W16
  Bottom 0.254: v46.99,55.88 47.62,55.88 48.26,55.24 R6.1
USB_FLAG1  (via drill 0.46)
  Top 0.254: U1.2 47.62,59.05 v44.45,55.88 U2.W14
  Bottom 0.254: v44.45,55.88 43.81,55.24 R7.1
USB_FLAG2  (via drill 0.46)
  Top 0.254: U1.3 47.62,57.78 v45.72,55.88 U2.W15
  Bottom 0.254: v45.72,55.88 46.35,55.24 R5.1
USBA_5V
  Top 0.61: U1.8 59.05,60.33 | 59.05,60.33 60.33,59.05 L1.1 | C2.1 58.2,64.03 C1.1 58.2,61.17 59.05,60.33
USBA_D+  (via drill 0.46)
  Top 0.254: U2.E19 34.29,19.68 36.2,21.59 47.62,21.59 v57.15,31.11
  Bottom 0.254: v57.15,31.11 59.69,31.11 67.31,38.73 67.31,54.61 66.04,55.88 R10.1 R12.2
USBA_D-  (via drill 0.46)
  Top 0.254: v57.15,29.84 48.26,20.95 36.83,20.95 35.56,19.68 U2.E18 | v67.94,55.24 v64.77,55.24
  Bottom 0.254: v57.15,29.84 57.78,30.48 60.33,30.48 67.94,38.1 v67.94,55.24 R9.1 | v64.77,55.24 62.87,55.24 62.23,55.88 R11.2
USBB_5V
  Top 0.61: U1.5 60.96,56.52 68.58,48.9 68.58,35.56 64.77,31.75 64.77,27.94 67.31,25.4 71.12,25.4 72.02,24.5 J1.2
USBB_D+  (via drill 0.46)
  Top 0.254: J1.13 64.48,11.14 63.5,10.16 v51.44,10.16 | v38.1,19.05 U2.E16
  Bottom 0.254: v51.44,10.16 51.44,13.34 45.09,19.68 38.73,19.68 v38.1,19.05
USBB_D-  (via drill 0.46)
  Top 0.254: J1.11 65.22,13.14 63.5,11.43 v50.16,11.43 | v39.37,18.41 U2.E15
  Bottom 0.254: v50.16,11.43 50.16,13.34 44.45,19.05 40.01,19.05 v39.37,18.41
USBC_D+  (via drill 0.46)
  Top 0.254: R16.1 v46.99,10.79 47.62,10.79 48.26,10.16 48.26,8.26 46.99,6.99 R15.1 | v43.18,16.51 U2.E12
  Bottom 0.254: v46.99,10.79 46.99,11.43 TP4.1 43.18,15.24 v43.18,16.51
USBC_D-  (via drill 0.46)
  Top 0.254: R17.1 v46.99,8.89 | v41.91,17.78 U2.E13
  Bottom 0.254: v46.99,8.89 48.26,10.16 TP5.1 43.18,17.78 v41.91,17.78
V_AUX_MON
  Bottom 0.254: J10.3 27.94,57.15 29.84,59.05 41.27,59.05 43.18,57.15 R24.2
V_AUX_ON  (via drill 0.61)
  Top 0.254: U2.W9 38.1,50.16 34.92,46.99 v27.94,46.99 | v15.88,46.99 v12.06,46.99
  Bottom 0.254: J9.4 1.91,52.7 7.62,46.99 v12.06,46.99 | v27.94,46.99 v15.88,46.99
V_MAIN
  Top 0.813: F1.2 10.79,64.14 10.16,63.5 | 10.16,63.5 J9.1 | J9.1 C19.1 | 10.16,63.5 J9.1
VCC
  Top 0.61: C22.1 4.95,61.47 | U5.3 5.71,58.42 6.35,59.05 6.99,58.42 U5.2 | 4.95,61.09 4.95,61.47 | 4.95,61.47 5.08,61.59
  Top 0.813: 4.95,61.09 6.35,59.69 6.35,59.05 | 5.08,61.59 2.54,61.59 J9.2
  Bottom 0.254: J9.2 R22.1
VREF  (via drill 0.46)
  Top 0.254: U2.W19 v50.8,50.16
  Bottom 0.254: C26.1 R28.1 51.22,50.59 v50.8,50.16 49.84,49.21 U7.1
XTI
  Top 0.254: Q1.2 40.64,2.54 39.37,1.27 33.66,1.27 32.38,2.54 U3.28
  Bottom 0.254: Q1.2 R13.2 44.23,3.39 43.81,3.81 C5.1
XTO
  Top 0.254: U3.1 39.37,2.54 41.27,4.45 46.35,4.45 47.5,3.3 Q1.1
  Bottom 0.254: Q1.1 R13.1 45.94,3.39 46.35,3.81 C4.1

## Text on the board
tPlace: BFRIGON.COM
bPlace: DTX | GND | DRX
bNames: VBAT | + | - | D+ | D-
_tsilk: J8 | C19 | L3 | C18 | L5 | C2 | C3 | F1 | J6 | C22 | J5 | U1 | L2 | DA1 | C1 | C24 | J10 | C21 | L1 | D1 | C25 | J9 | U2 | U6 | U5 | R27 | W | R25 | R23 | L4 | C23 | R3 | J2 | R4 | A | CLOCK | PC-03 | Rev. | S | N | C9 | C17 | R20 | R30 | C10 | U4 | R18 | R29 | E | R19 | C13 | C14 | R21 | C16 | R16 | J1 | J7 | R17 | R15 | C8 | Q1 | C7 | C6 | U3 | BFRIGON.COM
_bsilk: C20 | R22 | R11 | R12 | R24 | R26 | R10 | R9 | R5 | R6 | R8 | R7 | U7 | R28 | C26 | R1 | R2 | J3 | J4 | DTX | GND | DRX | VBAT | + | - | D+ | D- | C11 | C12 | R14 | C5 | C4 | R13